# Altium PCB msr50.PcbDoc (part 7 of 8)
Units mil, origin at the board's own origin, x right, y up, seen from the top; angles counter-clockwise.
Board outline 3925 x 3925 mil, 2 copper layers (TopLayer, BottomLayer); 109 components, 122 nets, 846 pads, 52 vias.
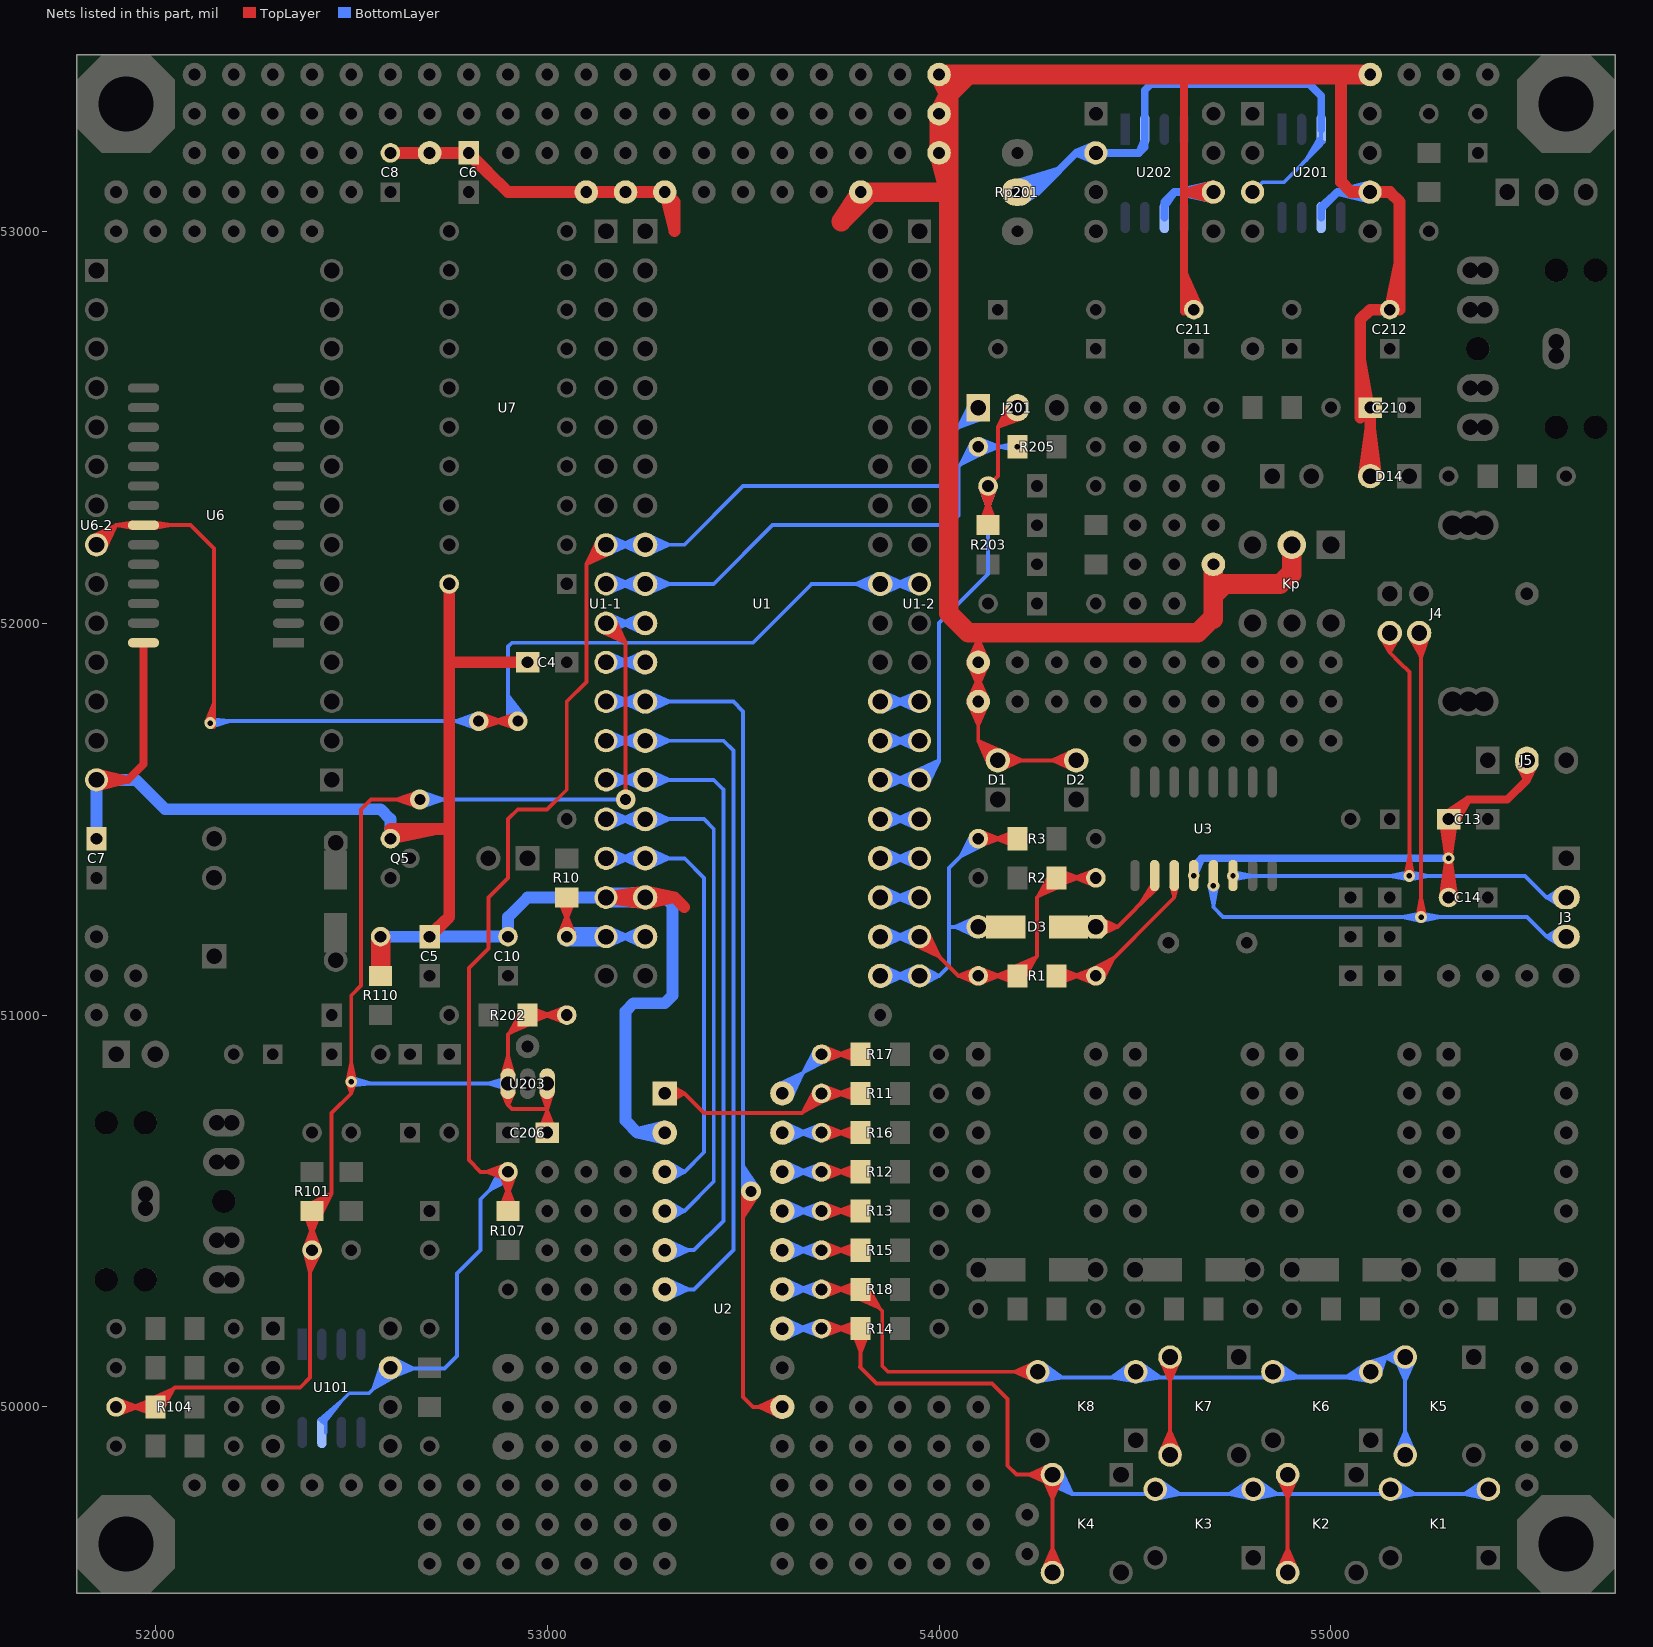
[diagram p7: the nets of this part, all layers, seen from the top]

## Via types
v1: diameter 30, hole 14, TopLayer to BottomLayer, 40 vias
v2: diameter 50, hole 28, TopLayer to BottomLayer, 12 vias

## Nets (pads, with @x,y where several pads share a name; then routed paths per layer and width w, separated by ;. In a path a pad name is that pad's centre, name@x,y a point inside that pad or via, vN(x,y) a via of type N, cw(c..) or ccw(c..) an arc to the next point about the centre after c; other vN are vias at no path point) (continued)
P10: J201.1 R107.2 R107.4 U1-1.9 U1.9 U101.7 U101.17 | length 8040.3
  TopLayer w10: R107.4@52879.77,50503.81 52900,50555.59 ; R107.2@52880.33,50596.36 52900,50545 ; R107.2@52880.4,50596 52900,50550 ; R107.4@52889.46,50501.01 52900,50555.59 ; R107.2@52890.05,50599 52900,50550 ; R107.2@52890.04,50599.09 52900,50545 ; R107.2@52896.36,50580.33 52845,50600 ; R107.2@52896.36,50619.67 52845,50600 ; R107.2@52899.09,50590.04 52845,50600 ; R107.2@52899.09,50609.96 52845,50600 ; R107.4@52900,50500 52900,50570 ; R107.2@52909.95,50599 52900,50550 ; R107.2@52909.96,50599.09 52900,50545 ; R107.4@52910.54,50501.01 52900,50555.59 ; R107.2@52919.6,50596 52900,50550 ; R107.2@52919.67,50596.36 52900,50545 ; R107.4@52920.23,50503.81 52900,50555.59 ; U1-1.9@53129.91,52214.07 53100,52150 ; U1-1.9@53138.73,52209.16 53100,52150 ; U1-1.9@53150,52200 53100,52150 ; U1-1.9@53159.16,52188.73 53100,52150 ; U1-1.9@53164.07,52179.91 53100,52150 ; R107.2@52881.14,50593.33 52900,50570 ; R107.2@52881.14,50593.33 52900,50570 ; R107.2@52881.14,50593.33 52900,50570 ; R107.2@52890.14,50598.33 52900,50570 ; R107.2@52890.14,50598.33 52900,50570 ; R107.2@52890.14,50598.33 52900,50570 ; 52900,50550 52900,50570 ; 52900,50570 R107.2@52909.86,50598.33 ; 52900,50570 R107.2@52918.86,50593.33 ; 52900,50570 R107.2@52909.86,50598.33 ; 52900,50570 R107.2@52918.86,50593.33 ; 52900,50570 R107.2@52909.86,50598.33 ; 52900,50570 R107.2@52918.86,50593.33 ; 52900,50570 R107.2@52900,50600 52830,50600 52800,50630 52800,51120 52850,51170 52850,51300 52900,51350 52900,51500 52925,51525 53000,51525 53050,51575 53050,51800 53100,51850 53100,52150
  BottomLayer w10: U101.17@52420.2,49968.1 52472.44,50012.44 ; U101.17@52425,49963 52472.44,50012.44 ; U101.17@52430.29,49958.42 52472.44,50012.44 ; U101.17@52435,49935 52435,49975 52495,50035 52545,50035 U101.7@52605.12,50095.12 ; U101.7@52578.53,50111.86 52556.39,50046.39 ; U101.7@52587.83,50107.93 52556.39,50046.39 ; U101.7@52601.19,50085.52 52659.59,50097.62 ; U101.7@52602.34,50114.34 52659.59,50097.62 ; U101.7@52602.62,50097.62 52737.62,50097.62 52770,50130 52770,50340 52830,50400 52830,50530 R107.2@52900,50600 ; U101.7@52604.08,50075.81 52659.59,50097.62 ; U101.7@52606,50123.78 52659.59,50097.62 ; U101.7@52610.24,50089.7 52556.39,50046.39 ; U101.7@52615.98,50081.39 52556.39,50046.39 ; R107.2@52883.86,50611.81 52853.79,50553.79 ; R107.2@52892.41,50606.51 52853.79,50553.79 ; R107.2@52906.51,50592.41 52853.79,50553.79 ; R107.2@52911.81,50583.86 52853.79,50553.79 ; U1-1.9@53150,52200 U1.9@53250,52200 53350,52200 53500,52350 54000,52350 54025,52375 54025,52475 J201.1@54100,52550 ; U1-1.9@53151.77,52185.58 53209.53,52200 ; U1-1.9@53151.77,52214.42 53209.53,52200 ; U1-1.9@53155.05,52176 53209.53,52200 ; U1-1.9@53155.05,52224 53209.53,52200 ; U1.9@53244.46,52174.6 53189,52200 ; U1.9@53244.46,52225.4 53189,52200 ; U1.9@53247.9,52184.14 53189,52200 ; U1.9@53247.9,52215.86 53189,52200 ; U1.9@53249.7,52194.01 53189,52200 ; U1.9@53249.7,52205.99 53189,52200 ; U1.9@53250.3,52194.01 53311,52200 ; U1.9@53250.3,52205.99 53311,52200 ; U1.9@53252.1,52184.14 53311,52200 ; U1.9@53252.1,52215.86 53311,52200 ; U1.9@53255.54,52174.6 53311,52200 ; U1.9@53255.54,52225.4 53311,52200 ; J201.1@54080.17,52560.22 54048.79,52498.79 ; J201.1@54088.8,52554.98 54048.79,52498.79 ; J201.1@54100,52545 54048.79,52498.79 ; J201.1@54108.78,52532.84 54048.79,52498.79 ; J201.1@54113.11,52523.71 54048.79,52498.79 ; 52556.39,50046.39 U101.7@52600,50100 52659.59,50097.62
P11: R205.2 R205.4 U1-1.10 U1.10 | length 2817.7
  BottomLayer w10: U1-1.10@53150,52100 U1.10@53250,52100 53425,52100 53575,52250 54025,52250 54050,52275 54050,52400 R205.2@54100,52450 v1(54200,52450) ; U1-1.10@53151.77,52085.58 53209.53,52100 ; U1-1.10@53151.77,52114.42 53209.53,52100 ; U1-1.10@53155.05,52076 53209.53,52100 ; U1-1.10@53155.05,52124 53209.53,52100 ; U1.10@53244.46,52074.6 53189,52100 ; U1.10@53244.46,52125.4 53189,52100 ; U1.10@53247.9,52084.14 53189,52100 ; U1.10@53247.9,52115.86 53189,52100 ; U1.10@53249.7,52094.01 53189,52100 ; U1.10@53249.7,52105.99 53189,52100 ; U1.10@53250.3,52094.01 53311,52100 ; U1.10@53250.3,52105.99 53311,52100 ; U1.10@53252.1,52084.14 53311,52100 ; U1.10@53252.1,52115.86 53311,52100 ; U1.10@53255.54,52074.6 53311,52100 ; U1.10@53255.54,52125.4 53311,52100 ; R205.2@54083.86,52461.81 54053.79,52403.79 ; R205.2@54092.41,52456.51 54053.79,52403.79 ; R205.2@54100.91,52440.04 54155,52450 ; R205.2@54100.91,52459.96 54155,52450 ; R205.2@54103.64,52430.33 54155,52450 ; R205.2@54103.64,52469.67 54155,52450 ; R205.2@54106.51,52442.41 54053.79,52403.79 ; R205.2@54111.81,52433.86 54053.79,52403.79 ; v1@54198.98,52440.05 54151,52450 v1@54198.98,52459.95
P12: C206.1 R101.2 R101.4 R104.2 R104.4 R202.2 R202.4 U1-1.11 U1.11 U203.1 U203.3 | length 9227.6
  TopLayer w10: R104.2@51900,50000 R104.4@52000,50000 52050,50050 52370,50050 52395,50075 R101.2@52395,50405 ; R104.2@51900.91,49990.04 51955,50000 ; R104.2@51900.91,50009.96 51955,50000 ; R104.2@51903.64,49980.33 51955,50000 ; R104.2@51903.64,50019.67 51955,50000 ; R104.4@51988.74,50021.18 52046.8,50046.8 ; R104.4@51993.52,50012.32 52046.8,50046.8 ; R104.4@51996.19,49979.77 51944.41,50000 ; R104.4@51996.19,50020.23 51944.41,50000 ; R104.4@51998.99,49989.46 51944.41,50000 ; R104.4@51998.99,50010.54 51944.41,50000 ; R104.4@52000,50003.94 52046.8,50046.8 ; R104.4@52007.78,49996.75 52046.8,50046.8 ; R104.4@52016.19,49991.21 52046.8,50046.8 ; R101.4@52379.77,50496.19 52400,50444.41 ; R101.2@52380.08,50398.19 52395,50344.65 ; R101.2@52380.33,50403.64 52400,50455 ; R101.4@52389.46,50498.99 52400,50444.41 ; R101.2@52390,50400 52395,50344.65 ; R101.2@52390.04,50400.91 52400,50455 ; R101.4@52392.09,50516.84 52450,50545 ; R101.4@52397.18,50508.16 52450,50545 ; 52400,50425 R101.4@52400,50500 ; R101.4@52403.94,50500 52450,50545 ; R101.2@52409.84,50398.21 52395,50344.65 ; R101.2@52409.96,50400.91 52400,50455 ; R101.4@52410,50505 52450,50545 ; R101.4@52410.54,50498.99 52400,50444.41 ; R101.4@52411.94,50493.06 52450,50545 ; R101.2@52419.27,50394.65 52395,50344.65 ; R101.2@52419.67,50403.64 52400,50455 ; R101.4@52420.23,50496.19 52400,50444.41 ; R101.4@52420.5,50487.76 52450,50545 ; v1@52490.05,50831.02 52500,50879 v1@52509.95,50831.02 ; v1@52490.14,50828.33 52500,50800 ; v1@52509.86,50828.33 52500,50800 ; v2@52671.61,51530.29 52616,51550 ; v2@52671.61,51569.71 52616,51550 ; v2@52674.15,51540.04 52616,51550 ; v2@52674.15,51559.96 52616,51550 ; v2(52675,51550) 52550,51550 52525,51525 52525,51075 52500,51050 52500,50800 ; U203.1@52885.48,50846.86 52900,50894.37 ; U203.1@52885.64,50802.26 52900,50770 ; U203.1@52900,50805.31 52900,50770 ; U203.1@52900,50844.69 52900,50894.37 ; U203.1@52914.36,50802.26 52900,50770 ; U203.1@52914.52,50846.86 52900,50894.37 ; R202.4@52933.81,51008.79 52903.2,50953.2 ; R202.4@52942.22,51003.25 52903.2,50953.2 ; R202.4@52950,50996.06 52903.2,50953.2 ; R202.4@52951.01,50989.46 53005.59,51000 ; R202.4@52951.01,51010.54 53005.59,51000 ; R202.4@52953.81,50979.77 53005.59,51000 ; R202.4@52953.81,51020.23 53005.59,51000 ; R202.4@52956.48,50987.68 52903.2,50953.2 ; R202.4@52961.26,50978.82 52903.2,50953.2 ; C206.1@52979.37,50703.94 53000,50756 ; U203.3@52985.51,50802.94 53000,50760 ; C206.1@52989.05,50701.08 53000,50756 ; C206.1@53000,50700 53000,50760 ; U203.3@53000,50805.32 53000,50760 ; U203.3@53000,50825 53000,50760 ; C206.1@53010.95,50701.08 53000,50756 ; U203.3@53014.49,50802.94 53000,50760 ; C206.1@53020.63,50703.94 53000,50756 ; R202.2@53046.36,50980.33 52995,51000 ; R202.2@53046.36,51019.67 52995,51000 ; R202.2@53049.09,50990.04 52995,51000 ; R202.2@53049.09,51009.96 52995,51000 ; R202.2@53050,51000 R202.4@52950,51000 52900,50950 U203.1@52900,50825 52900,50770 ; U1-1.11@53135.93,51979.91 53200,51950 ; U1-1.11@53140.84,51988.73 53200,51950 ; U1-1.11@53150,52000 53200,51950 ; U1-1.11@53161.27,52009.16 53200,51950 ; U1-1.11@53170.09,52014.07 53200,51950 ; v2(53200,51550) 53200,51950 ; 52395,50344.65 R101.2@52400,50400 52400,50455 ; 52450,50545 52450,50750 52500,50800 ; 52900,50770 52910,50760 53000,50760
  BottomLayer w10: v1@52500,50820 52549.79,50825 ; v1(52500,50830) 52549.79,50825 ; v1@52501.99,50839.8 52549.79,50825 ; v1@52505,50825 U203.1@52900,50825 ; v2(52675,51550) v2(53200,51550) ; v2@52675.85,51540.04 52734,51550 ; v2@52675.85,51559.96 52734,51550 ; v2@52678.39,51530.29 52734,51550 ; v2@52678.39,51569.71 52734,51550 ; U203.1@52897.83,50810.48 52850.32,50825 U203.1@52897.83,50839.52 ; U1-1.11@53150,52000 U1.11@53250,52000 ; U1-1.11@53151.77,51985.58 53209.53,52000 ; U1-1.11@53151.77,52014.42 53209.53,52000 ; U1-1.11@53155.05,51976 53209.53,52000 ; U1-1.11@53155.05,52024 53209.53,52000 ; U1.11@53244.46,51974.6 53189,52000 ; U1.11@53244.46,52025.4 53189,52000 ; U1.11@53247.9,51984.14 53189,52000 ; U1.11@53247.9,52015.86 53189,52000 ; U1.11@53249.7,51994.01 53189,52000 ; U1.11@53249.7,52005.99 53189,52000
P13: U1-1.12 U1.12 | length 704.1
  BottomLayer w10: U1-1.12@53150,51900 U1.12@53250,51900 ; U1-1.12@53151.77,51885.58 53209.53,51900 ; U1-1.12@53151.77,51914.42 53209.53,51900 ; U1-1.12@53155.05,51876 53209.53,51900 ; U1-1.12@53155.05,51924 53209.53,51900 ; U1.12@53244.46,51874.6 53189,51900 ; U1.12@53244.46,51925.4 53189,51900 ; U1.12@53247.9,51884.14 53189,51900 ; U1.12@53247.9,51915.86 53189,51900 ; U1.12@53249.7,51894.01 53189,51900 ; U1.12@53249.7,51905.99 53189,51900
P14: U1-1.13 U1.13 U2.16 | length 4238.4
  TopLayer w10: v2@53500,50550 53500,50025 53525,50000 U2.16@53600,50000 ; v2@53500.23,50553.02 53500,50485.39 ; v2@53510.25,50552.24 53500,50485.39 ; v2(53520,50550) 53500,50485.39 ; v2@53529.31,50546.35 53500,50485.39 ; v2@53538.02,50541.33 53500,50485.39 ; U2.16@53594.46,49974.6 53539,50000 ; U2.16@53594.46,50025.4 53539,50000 ; U2.16@53597.9,49984.14 53539,50000 ; U2.16@53597.9,50015.86 53539,50000 ; U2.16@53599.7,49994.01 53539,50000 ; U2.16@53599.7,50005.99 53539,50000
  BottomLayer w10: U1-1.13@53150,51800 U1.13@53250,51800 53475,51800 53500,51775 v2@53500,50540 ; U1-1.13@53151.77,51785.58 53209.53,51800 ; U1-1.13@53151.77,51814.42 53209.53,51800 ; U1-1.13@53155.05,51776 53209.53,51800 ; U1-1.13@53155.05,51824 53209.53,51800 ; U1.13@53244.46,51774.6 53189,51800 ; U1.13@53244.46,51825.4 53189,51800 ; U1.13@53247.9,51784.14 53189,51800 ; U1.13@53247.9,51815.86 53189,51800 ; U1.13@53249.7,51794.01 53189,51800 ; U1.13@53249.7,51805.99 53189,51800 ; U1.13@53250.3,51794.01 53311,51800 ; U1.13@53250.3,51805.99 53311,51800 ; U1.13@53252.1,51784.14 53311,51800 ; U1.13@53252.1,51815.86 53311,51800 ; U1.13@53255.54,51774.6 53311,51800 ; U1.13@53255.54,51825.4 53311,51800 ; v2@53500.24,50546.93 53500,50613.62 ; v2@53510.26,50547.72 53500,50613.62 ; v2(53520,50550) 53500,50613.62 ; v2@53529.29,50553.71 53500,50613.62 ; v2@53537.96,50558.79 53500,50613.62
P15: U1-1.14 U1.14 U2.6 | length 3162.9
  BottomLayer w10: U1-1.14@53150,51700 U1.14@53250,51700 53450,51700 53475,51675 53475,50400 53375,50300 U2.6@53300,50300 ; U1-1.14@53151.77,51685.58 53209.53,51700 ; U1-1.14@53151.77,51714.42 53209.53,51700 ; U1-1.14@53155.05,51676 53209.53,51700 ; U1-1.14@53155.05,51724 53209.53,51700 ; U1.14@53244.46,51674.6 53189,51700 ; U1.14@53244.46,51725.4 53189,51700 ; U1.14@53247.9,51684.14 53189,51700 ; U1.14@53247.9,51715.86 53189,51700 ; U1.14@53249.7,51694.01 53189,51700 ; U1.14@53249.7,51705.99 53189,51700 ; U1.14@53250.3,51694.01 53311,51700 ; U1.14@53250.3,51705.99 53311,51700 ; U1.14@53252.1,51684.14 53311,51700 ; U1.14@53252.1,51715.86 53311,51700 ; U1.14@53255.54,51674.6 53311,51700 ; U1.14@53255.54,51725.4 53311,51700 ; U2.6@53300.3,50294.01 53361,50300 ; U2.6@53300.3,50305.99 53361,50300 ; U2.6@53302.1,50284.14 53361,50300 ; U2.6@53302.1,50315.86 53361,50300 ; U2.6@53305.54,50274.6 53361,50300 ; U2.6@53305.54,50325.4 53361,50300
P16: U1-1.15 U1.15 U2.5 | length 2927.5
  BottomLayer w10: U1-1.15@53150,51600 U1.15@53250,51600 53425,51600 53450,51575 53450,50475 53375,50400 U2.5@53300,50400 ; U1-1.15@53151.77,51585.58 53209.53,51600 ; U1-1.15@53151.77,51614.42 53209.53,51600 ; U1-1.15@53155.05,51576 53209.53,51600 ; U1-1.15@53155.05,51624 53209.53,51600 ; U1.15@53244.46,51574.6 53189,51600 ; U1.15@53244.46,51625.4 53189,51600 ; U1.15@53247.9,51584.14 53189,51600 ; U1.15@53247.9,51615.86 53189,51600 ; U1.15@53249.7,51594.01 53189,51600 ; U1.15@53249.7,51605.99 53189,51600 ; U1.15@53250.3,51594.01 53311,51600 ; U1.15@53250.3,51605.99 53311,51600 ; U1.15@53252.1,51584.14 53311,51600 ; U1.15@53252.1,51615.86 53311,51600 ; U1.15@53255.54,51574.6 53311,51600 ; U1.15@53255.54,51625.4 53311,51600 ; U2.5@53300.3,50394.01 53361,50400 ; U2.5@53300.3,50405.99 53361,50400 ; U2.5@53302.1,50384.14 53361,50400 ; U2.5@53302.1,50415.86 53361,50400 ; U2.5@53305.54,50374.6 53361,50400 ; U2.5@53305.54,50425.4 53361,50400
P17: U1-1.16 U1.16 U2.4 | length 2611.5
  BottomLayer w10: U1-1.16@53150,51500 U1.16@53250,51500 53400,51500 53425,51475 53425,50575 53350,50500 ; U1-1.16@53151.77,51485.58 53209.53,51500 ; U1-1.16@53151.77,51514.42 53209.53,51500 ; U1-1.16@53155.05,51476 53209.53,51500 ; U1-1.16@53155.05,51524 53209.53,51500 ; U1.16@53244.46,51474.6 53189,51500 ; U1.16@53244.46,51525.4 53189,51500 ; U1.16@53247.9,51484.14 53189,51500 ; U1.16@53247.9,51515.86 53189,51500 ; U1.16@53249.7,51494.01 53189,51500 ; U1.16@53249.7,51505.99 53189,51500 ; U1.16@53250.3,51494.01 53311,51500 ; U1.16@53250.3,51505.99 53311,51500 ; U1.16@53252.1,51484.14 53311,51500 ; U1.16@53252.1,51515.86 53311,51500 ; U1.16@53255.54,51474.6 53311,51500 ; U1.16@53255.54,51525.4 53311,51500 ; U2.4@53300,50500 53350,50500 ; U2.4@53300.36,50494.01 53350,50500 ; U2.4@53300.36,50505.99 53350,50500 ; U2.4@53302.56,50484.21 53350,50500 ; U2.4@53302.56,50515.79 53350,50500 ; U2.4@53306.76,50474.89 53350,50500 ; U2.4@53306.76,50525.11 53350,50500
P32: U1-2.18 U1.23 | length 704.1
  BottomLayer w10: U1.23@53850,51300 U1-2.18@53950,51300 ; U1.23@53850.3,51294.01 53911,51300 ; U1.23@53850.3,51305.99 53911,51300 ; U1.23@53852.1,51284.14 53911,51300 ; U1.23@53852.1,51315.86 53911,51300 ; U1.23@53855.54,51274.6 53911,51300 ; U1.23@53855.54,51325.4 53911,51300 ; U1-2.18@53944.95,51276 53890.47,51300 ; U1-2.18@53944.95,51324 53890.47,51300 ; U1-2.18@53948.23,51285.58 53890.47,51300 ; U1-2.18@53948.23,51314.42 53890.47,51300
P33: U1-2.17 U1.24 | length 704.1
  BottomLayer w10: U1.24@53850,51400 U1-2.17@53950,51400 ; U1.24@53850.3,51394.01 53911,51400 ; U1.24@53850.3,51405.99 53911,51400 ; U1.24@53852.1,51384.14 53911,51400 ; U1.24@53852.1,51415.86 53911,51400 ; U1.24@53855.54,51374.6 53911,51400 ; U1.24@53855.54,51425.4 53911,51400 ; U1-2.17@53944.95,51376 53890.47,51400 ; U1-2.17@53944.95,51424 53890.47,51400 ; U1-2.17@53948.23,51385.58 53890.47,51400 ; U1-2.17@53948.23,51414.42 53890.47,51400
P34: U1-2.16 U1.25 | length 704.1
  BottomLayer w10: U1.25@53850,51500 U1-2.16@53950,51500 ; U1.25@53850.3,51494.01 53911,51500 ; U1.25@53850.3,51505.99 53911,51500 ; U1.25@53852.1,51484.14 53911,51500 ; U1.25@53852.1,51515.86 53911,51500 ; U1.25@53855.54,51474.6 53911,51500 ; U1.25@53855.54,51525.4 53911,51500 ; U1-2.16@53944.95,51476 53890.47,51500 ; U1-2.16@53944.95,51524 53890.47,51500 ; U1-2.16@53948.23,51485.58 53890.47,51500 ; U1-2.16@53948.23,51514.42 53890.47,51500
P35: J201.2 R203.1 R203.3 U1-2.15 U1.26 | length 3139.2
  TopLayer w10: R203.3@54104.77,52253.81 54125,52305.59 ; R203.1@54105.33,52346.36 54125,52295 ; R203.3@54114.46,52251.01 54125,52305.59 ; R203.1@54115.04,52349.09 54125,52295 ; R203.3@54125,52250 R203.1@54125,52350 54150,52375 54150,52500 ; R203.1@54134.96,52349.09 54125,52295 ; R203.3@54135.54,52251.01 54125,52305.59 ; R203.1@54144.67,52346.36 54125,52295 ; R203.3@54145.23,52253.81 54125,52305.59 ; J201.2@54180.11,52560.15 54150,52500 ; J201.2@54188.79,52554.96 54150,52500 ; J201.2@54200,52545 54150,52500 ; J201.2@54200,52550 54150,52500 ; J201.2@54208.73,52532.8 54150,52500 ; J201.2@54212.98,52523.63 54150,52500
  BottomLayer w10: U1.26@53850,51600 U1-2.15@53950,51600 54000,51650 ; U1.26@53850.3,51594.01 53911,51600 ; U1.26@53850.3,51605.99 53911,51600 ; U1.26@53852.1,51584.14 53911,51600 ; U1.26@53852.1,51615.86 53911,51600 ; U1.26@53855.54,51574.6 53911,51600 ; U1.26@53855.54,51625.4 53911,51600 ; U1-2.15@53935.93,51620.09 54000,51650 ; U1-2.15@53940.84,51611.27 54000,51650 ; U1-2.15@53944.95,51576 53890.47,51600 ; U1-2.15@53944.95,51624 53890.47,51600 ; U1-2.15@53948.23,51585.58 53890.47,51600 ; U1-2.15@53948.23,51614.42 53890.47,51600 ; U1-2.15@53961.27,51590.84 54000,51650 ; U1-2.15@53970.09,51585.93 54000,51650 ; R203.1@54105.33,52346.36 54125,52295 ; R203.1@54115.04,52349.09 54125,52295 ; R203.1@54125,52350 54125,52125 54000,52000 54000,51650 ; R203.1@54134.96,52349.09 54125,52295 ; R203.1@54144.67,52346.36 54125,52295
P36: U1-2.14 U1.27 | length 704.1
  BottomLayer w10: U1.27@53850,51700 U1-2.14@53950,51700 ; U1.27@53850.3,51694.01 53911,51700 ; U1.27@53850.3,51705.99 53911,51700 ; U1.27@53852.1,51684.14 53911,51700 ; U1.27@53852.1,51715.86 53911,51700 ; U1.27@53855.54,51674.6 53911,51700 ; U1.27@53855.54,51725.4 53911,51700 ; U1-2.14@53944.95,51676 53890.47,51700 ; U1-2.14@53944.95,51724 53890.47,51700 ; U1-2.14@53948.23,51685.58 53890.47,51700 ; U1-2.14@53948.23,51714.42 53890.47,51700
P37: U1-2.13 U1.28 | length 704.1
  BottomLayer w10: U1.28@53850,51800 U1-2.13@53950,51800 ; U1.28@53850.3,51794.01 53911,51800 ; U1.28@53850.3,51805.99 53911,51800 ; U1.28@53852.1,51784.14 53911,51800 ; U1.28@53852.1,51815.86 53911,51800 ; U1.28@53855.54,51774.6 53911,51800 ; U1.28@53855.54,51825.4 53911,51800 ; U1-2.13@53944.95,51776 53890.47,51800 ; U1-2.13@53944.95,51824 53890.47,51800 ; U1-2.13@53948.23,51785.58 53890.47,51800 ; U1-2.13@53948.23,51814.42 53890.47,51800
P54: U1-1.17 U1.17 U2.3 | length 2361.5
  BottomLayer w10: U1-1.17@53150,51400 U1.17@53250,51400 53350,51400 53400,51350 53400,50650 53350,50600 ; U1-1.17@53151.77,51385.58 53209.53,51400 ; U1-1.17@53151.77,51414.42 53209.53,51400 ; U1-1.17@53155.05,51376 53209.53,51400 ; U1-1.17@53155.05,51424 53209.53,51400 ; U1.17@53244.46,51374.6 53189,51400 ; U1.17@53244.46,51425.4 53189,51400 ; U1.17@53247.9,51384.14 53189,51400 ; U1.17@53247.9,51415.86 53189,51400 ; U1.17@53249.7,51394.01 53189,51400 ; U1.17@53249.7,51405.99 53189,51400 ; U1.17@53250.3,51394.01 53311,51400 ; U1.17@53250.3,51405.99 53311,51400 ; U1.17@53252.1,51384.14 53311,51400 ; U1.17@53252.1,51415.86 53311,51400 ; U1.17@53255.54,51374.6 53311,51400 ; U1.17@53255.54,51425.4 53311,51400 ; U2.3@53300,50600 53350,50600 ; U2.3@53300.36,50594.01 53350,50600 ; U2.3@53300.36,50605.99 53350,50600 ; U2.3@53302.56,50584.21 53350,50600 ; U2.3@53302.56,50615.79 53350,50600 ; U2.3@53306.76,50574.89 53350,50600 ; U2.3@53306.76,50625.11 53350,50600
P55: R10.1 R10.3 U1-1.19 U1.19 | length 1346.5
  TopLayer w10: R10.3@53029.77,51296.19 53050,51244.41 ; R10.1@53030.33,51203.64 53050,51255 ; R10.3@53039.46,51298.99 53050,51244.41 ; R10.1@53040.04,51200.91 53050,51255 ; R10.1@53050,51200 R10.3@53050,51300 ; R10.1@53059.96,51200.91 53050,51255 ; R10.3@53060.54,51298.99 53050,51244.41 ; R10.1@53069.67,51203.64 53050,51255 ; R10.3@53070.23,51296.19 53050,51244.41
  BottomLayer w10: U1-1.19@53150,51200 U1.19@53250,51200 ; U1-1.19@53151.77,51185.58 53209.53,51200 ; U1-1.19@53151.77,51214.42 53209.53,51200 ; U1-1.19@53155.05,51176 53209.53,51200 ; U1-1.19@53155.05,51224 53209.53,51200 ; U1.19@53244.46,51174.6 53189,51200 ; U1.19@53244.46,51225.4 53189,51200 ; U1.19@53247.9,51184.14 53189,51200 ; U1.19@53247.9,51215.86 53189,51200 ; U1.19@53249.7,51194.01 53189,51200 ; U1.19@53249.7,51205.99 53189,51200
  BottomLayer w50: R10.1@53050,51200 U1-1.19@53150,51200
R\D\: U1-2.10 U1.31 U6-2.8 U6.22 | length 5769.4
  TopLayer w10: U6-2.8@51835.93,52220.09 51900,52250 ; U6-2.8@51840.84,52211.27 51900,52250 ; U6-2.8@51850,52200 51900,52250 ; U6-2.8@51861.27,52190.84 51900,52250 ; U6-2.8@51870.09,52185.93 51900,52250 ; U6.22@51941.18,52243.21 51900,52250 ; U6.22@51941.18,52256.79 51900,52250 ; U6.22@51941.73,52250 51900,52250 ; U6.22@51998.11,52250 52039.92,52250 ; U6.22@51998.67,52243.21 52039.92,52250 ; U6.22@51998.67,52256.79 52039.92,52250 ; v1@52130.42,51747.88 52150,51795.54 ; v1(52140,51745) 52150,51795.54 ; v1@52149.95,51744.02 52150,51795.54 ; v1@52150,51735 52150,52190 52090,52250 U6.22@51969.92,52250 51900,52250 ; v2(52825,51750) v2(52925,51750) ; v2@52825.85,51740.04 52884,51750 ; v2@52825.85,51759.96 52884,51750 ; v2@52828.39,51730.29 52884,51750 ; v2@52828.39,51769.71 52884,51750 ; v2@52921.61,51730.29 52866,51750 ; v2@52921.61,51769.71 52866,51750 ; v2@52924.15,51740.04 52866,51750 ; v2@52924.15,51759.96 52866,51750
  BottomLayer w10: v1@52130,51750 v2(52825,51750) ; v1(52140,51745) 52189.4,51750 ; v1@52140,51755 52189.4,51750 ; v1@52142,51735.2 52189.4,51750 ; v2@52821.61,51730.29 52766,51750 ; v2@52821.61,51769.71 52766,51750 ; v2@52824.15,51740.04 52766,51750 ; v2@52824.15,51759.96 52766,51750 ; v2@52900,51750 52900,51940 52910,51950 53525,51950 53675,52100 U1.31@53850,52100 U1-2.10@53950,52100 ; v2@52905.48,51745.63 52900,51815.91 ; v2@52915.42,51747.13 52900,51815.91 ; v2(52925,51750) 52900,51815.91 ; v2@52934.07,51754.2 52900,51815.91 ; v2@52942.5,51759.67 52900,51815.91 ; U1.31@53844.46,52074.6 53789,52100 ; U1.31@53844.46,52125.4 53789,52100 ; U1.31@53847.9,52084.14 53789,52100 ; U1.31@53847.9,52115.86 53789,52100 ; U1.31@53849.7,52094.01 53789,52100 ; U1.31@53849.7,52105.99 53789,52100 ; U1.31@53850.3,52094.01 53911,52100 ; U1.31@53850.3,52105.99 53911,52100 ; U1.31@53852.1,52084.14 53911,52100 ; U1.31@53852.1,52115.86 53911,52100 ; U1.31@53855.54,52074.6 53911,52100 ; U1.31@53855.54,52125.4 53911,52100 ; U1-2.10@53944.95,52076 53890.47,52100 ; U1-2.10@53944.95,52124 53890.47,52100 ; U1-2.10@53948.23,52085.58 53890.47,52100 ; U1-2.10@53948.23,52114.42 53890.47,52100
RX: D3.1 D3.3 U3.2 | length 621.7
  TopLayer w10: D3.1@54400,51225 54455,51225 ; D3.1@54402.05,51210.14 54455,51225 ; D3.1@54402.05,51239.86 54455,51225 ; D3.1@54405.68,51200.65 54455,51225 ; D3.1@54405.68,51249.35 54455,51225 ; U3.2@54544.34,51332.12 54512.62,51282.62 ; U3.2@54550,51328 54512.62,51282.62 ; U3.2@54550,51356 54550,51320 54455,51225 ; U3.2@54555.13,51323.24 54512.62,51282.62
RXD: D3.2 D3.4 R3.1 R3.3 U1-2.20 U1.21 | length 2524.7
  TopLayer w10: R3.1@54100,51450 R3.3@54200,51450 ; R3.1@54100.91,51440.04 54155,51450 ; R3.1@54100.91,51459.96 54155,51450 ; R3.1@54103.64,51430.33 54155,51450 ; R3.1@54103.64,51469.67 54155,51450 ; R3.3@54196.19,51429.77 54144.41,51450 ; R3.3@54196.19,51470.23 54144.41,51450 ; R3.3@54198.99,51439.46 54144.41,51450 ; R3.3@54198.99,51460.54 54144.41,51450
  BottomLayer w10: U1.21@53850,51100 U1-2.20@53950,51100 54000,51100 ; U1.21@53850.3,51094.01 53911,51100 ; U1.21@53850.3,51105.99 53911,51100 ; U1.21@53852.1,51084.14 53911,51100 ; U1.21@53852.1,51115.86 53911,51100 ; U1.21@53855.54,51074.6 53911,51100 ; U1.21@53855.54,51125.4 53911,51100 ; U1-2.20@53944.95,51076 53890.47,51100 ; U1-2.20@53944.95,51124 53890.47,51100 ; U1-2.20@53948.23,51085.58 53890.47,51100 ; U1-2.20@53948.23,51114.42 53890.47,51100 ; U1-2.20@53952.11,51085.63 54000,51100 ; U1-2.20@53952.11,51114.37 54000,51100 ; U1-2.20@53956.02,51076.22 54000,51100 ; U1-2.20@53956.02,51123.78 54000,51100 ; 54030,51225 D3.2@54100,51225 ; R3.1@54083.86,51461.81 54053.79,51403.79 ; R3.1@54092.41,51456.51 54053.79,51403.79 ; D3.2@54094.79,51200.55 54040,51225 ; D3.2@54094.79,51249.45 54040,51225 ; D3.2@54098.12,51210.12 54040,51225 ; D3.2@54098.12,51239.88 54040,51225 ; R3.1@54106.51,51442.41 54053.79,51403.79 ; R3.1@54111.81,51433.86 54053.79,51403.79 ; 54000,51100 54025,51125 54025,51225 54025,51375 R3.1@54100,51450 54053.79,51403.79
SEG0: K1.2 K1.3 K2.2 K2.3 K3.2 K3.3 K4.2 K4.3 R14.2 R14.4 U2.18 | length 7256.5
  TopLayer w10: R14.2@53700,50200 R14.4@53800,50200 53800,50104.12 53797.94,50102.06 53840,50060 54135,50060 54175,50020 54175,49850 54197.62,49827.38 K4.2@54289.38,49827.38 K4.3@54289.38,49577.38 ; R14.2@53700.91,50190.04 53755,50200 ; R14.2@53700.91,50209.96 53755,50200 ; R14.2@53703.64,50180.33 53755,50200 ; R14.2@53703.64,50219.67 53755,50200 ; R14.4@53779.77,50192.25 53800,50140.47 ; R14.4@53789.46,50195.05 53800,50140.47 ; R14.4@53796.19,50179.77 53744.41,50200 ; R14.4@53796.19,50220.23 53744.41,50200 ; R14.4@53798.99,50189.46 53744.41,50200 ; R14.4@53798.99,50210.54 53744.41,50200 ; R14.4@53800,50196.06 53800,50140.47 ; R14.4@53810.54,50195.05 53800,50140.47 ; R14.4@53820.23,50192.25 53800,50140.47 ; K4.3@54264.92,49582.59 54289.38,49637.38 ; K4.2@54264.92,49822.17 54289.38,49767.38 ; K4.3@54274.49,49579.26 54289.38,49637.38 ; K4.2@54274.49,49825.51 54289.38,49767.38 ; K4.2@54284.17,49802.93 54229.38,49827.38 ; K4.2@54284.17,49851.83 54229.38,49827.38 ; K4.2@54287.5,49812.5 54229.38,49827.38 ; K4.2@54287.5,49842.26 54229.38,49827.38 ; K4.3@54304.26,49579.26 54289.38,49637.38 ; K4.2@54304.26,49825.51 54289.38,49767.38 ; K4.3@54313.83,49582.59 54289.38,49637.38 ; K4.2@54313.83,49822.17 54289.38,49767.38 ; K2.3@54864.92,49582.59 54889.38,49637.38 ; K2.2@54864.92,49822.17 54889.38,49767.38 ; K2.3@54874.49,49579.26 54889.38,49637.38 ; K2.2@54874.49,49825.51 54889.38,49767.38 ; K2.3@54889.38,49577.38 K2.2@54889.38,49827.38 ; K2.3@54904.26,49579.26 54889.38,49637.38 ; K2.2@54904.26,49825.51 54889.38,49767.38 ; K2.3@54913.83,49582.59 54889.38,49637.38 ; K2.2@54913.83,49822.17 54889.38,49767.38
  BottomLayer w10: U2.18@53600,50200 R14.2@53700,50200 ; U2.18@53600.3,50194.01 53661,50200 ; U2.18@53600.3,50205.99 53661,50200 ; U2.18@53602.1,50184.14 53661,50200 ; U2.18@53602.1,50215.86 53661,50200 ; U2.18@53605.54,50174.6 53661,50200 ; U2.18@53605.54,50225.4 53661,50200 ; R14.2@53696.36,50180.33 53645,50200 ; R14.2@53696.36,50219.67 53645,50200 ; R14.2@53699.09,50190.04 53645,50200 ; R14.2@53699.09,50209.96 53645,50200 ; K4.2@54275.1,49806.86 54339.38,49777.38 ; K4.2@54279.95,49815.71 54339.38,49777.38 ; K4.2@54289.38,49827.38 54339.38,49777.38 ; K4.2@54301.05,49836.8 54339.38,49777.38 ; K4.2@54309.9,49841.66 54339.38,49777.38 ; K3.3@54550.68,49774.93 54614.03,49777.38 ; K3.3@54551.87,49764.88 54614.03,49777.38 ; K3.3@54551.88,49789.88 54614.03,49777.38 ; K3.3@54556.55,49804.13 54614.03,49777.38 ; K3.3@54561.54,49812.94 54614.03,49777.38 ; K3.2@54792.18,49812.93 54739.92,49777.38 ; K3.2@54797.18,49804.13 54739.92,49777.38 ; K3.2@54800.67,49774.93 54863.5,49777.38 ; K3.2@54803.08,49774.93 54739.92,49777.38 ; K3.2@54806.59,49804.12 54863.5,49777.38 ; K3.2@54811.62,49812.91 54863.5,49777.38 ; K2.2@54865.17,49821.13 54889.38,49777.38 ; K2.2@54874.54,49825.13 54889.38,49777.38 ; K2.2@54889.38,49827.38 54889.38,49777.38 ; K2.2@54904.21,49825.13 54889.38,49777.38 ; K2.2@54913.58,49821.13 54889.38,49777.38 ; K1.3@55150.67,49774.93 55213.83,49777.38 ; K1.3@55151.87,49764.88 55213.83,49777.38 ; K1.3@55151.88,49789.88 55213.83,49777.38 ; K1.3@55156.57,49804.13 55213.83,49777.38 ; K1.3@55161.57,49812.93 55213.83,49777.38 ; K1.2@55392.22,49812.94 55339.69,49777.38 ; K1.2@55397.2,49804.14 55339.69,49777.38 ; K1.2@55401.88,49764.88 55339.69,49777.38 ; K1.2@55401.88,49777.38 54951.88,49777.38 54551.88,49777.38 54351.88,49777.38 54339.38,49777.38 ; K1.2@55401.88,49789.88 55339.69,49777.38 ; K1.2@55403.07,49774.93 55339.69,49777.38 ; 54739.92,49777.38 K3.2@54801.88,49789.88 54863.5,49777.38 ; 54739.92,49777.38 54801.88,49764.88 54863.5,49777.38
SEG1: K5.2 K5.3 K6.2 K6.3 K7.2 K7.3 K8.2 K8.3 R18.2 R18.4 U2.19 | length 8013.1
  TopLayer w10: R18.2@53700,50300 R18.4@53800,50300 53855,50245 53855,50105 53870.12,50089.88 K8.3@54251.88,50089.88 ; R18.2@53700.91,50290.04 53755,50300 ; R18.2@53700.91,50309.96 53755,50300 ; R18.2@53703.64,50280.33 53755,50300 ; R18.2@53703.64,50319.67 53755,50300 ; R18.4@53788.74,50278.82 53846.8,50253.2 ; R18.4@53793.52,50287.68 53846.8,50253.2 ; R18.4@53796.19,50279.77 53744.41,50300 ; R18.4@53796.19,50320.23 53744.41,50300 ; R18.4@53798.99,50289.46 53744.41,50300 ; R18.4@53798.99,50310.54 53744.41,50300 ; R18.4@53800,50296.06 53846.8,50253.2 ; R18.4@53807.78,50303.25 53846.8,50253.2 ; R18.4@53816.19,50308.79 53846.8,50253.2 ; K8.3@54246.67,50065.43 54191.88,50089.88 ; K8.3@54246.67,50114.33 54191.88,50089.88 ; K8.3@54250,50075 54191.88,50089.88 ; K8.3@54250,50104.76 54191.88,50089.88 ; K7.3@54564.92,49882.59 54589.38,49937.38 ; K7.2@54564.92,50122.17 54589.38,50067.38 ; K7.3@54574.49,49879.26 54589.38,49937.38 ; K7.2@54574.49,50125.51 54589.38,50067.38 ; K7.3@54589.38,49877.38 K7.2@54589.38,50127.38 ; K7.3@54604.26,49879.26 54589.38,49937.38 ; K7.2@54604.26,50125.51 54589.38,50067.38 ; K7.3@54613.83,49882.59 54589.38,49937.38 ; K7.2@54613.83,50122.17 54589.38,50067.38
  BottomLayer w10: U2.19@53600,50300 R18.2@53700,50300 ; U2.19@53600.3,50294.01 53661,50300 ; U2.19@53600.3,50305.99 53661,50300 ; U2.19@53602.1,50284.14 53661,50300 ; U2.19@53602.1,50315.86 53661,50300 ; U2.19@53605.54,50274.6 53661,50300 ; U2.19@53605.54,50325.4 53661,50300 ; R18.2@53696.36,50280.33 53645,50300 ; R18.2@53696.36,50319.67 53645,50300 ; R18.2@53699.09,50290.04 53645,50300 ; R18.2@53699.09,50309.96 53645,50300 ; K8.3@54250,50075 K6.2@55100,50075 ; K8.3@54250.14,50074.98 54314.96,50075 ; K8.3@54250.93,50064.9 54314.96,50075 ; K8.3@54251.88,50089.88 54314.96,50075 ; K8.3@54256.99,50103.99 54314.96,50075 ; K8.3@54262.2,50112.65 54314.96,50075 ; K8.2@54491.5,50112.63 54439.14,50075 ; K8.2@54496.74,50103.98 54439.14,50075 ; K8.2@54500.15,50074.98 54565.04,50075 ; K8.2@54500.94,50064.9 54565.04,50075 ; K8.2@54502.82,50064.9 54439.14,50075 ; K8.2@54503.62,50074.98 54439.14,50075 ; K8.2@54506.98,50103.99 54565.04,50075 ; K8.2@54512.19,50112.66 54565.04,50075 ; K7.2@54565.17,50121.13 54589.38,50077.38 ; K7.2@54574.54,50125.13 54589.38,50077.38 ; K7.2@54589.38,50127.38 54589.38,50077.38 ; K7.2@54604.21,50125.13 54589.38,50077.38 ; K7.2@54613.58,50121.13 54589.38,50077.38 ; K6.3@54850.13,50074.98 54914.6,50075 ; K6.3@54850.67,50074.93 54913.83,50077.38 ; K6.3@54850.93,50064.9 54914.6,50075 ; K6.3@54851.87,50064.88 54913.83,50077.38 ; K6.3@54851.88,50077.38 K6.2@55101.88,50077.38 ; K6.3@54856.57,50104.13 54913.83,50077.38 ; K6.3@54857.01,50103.98 54914.6,50075 ; K6.3@54861.57,50112.93 54913.83,50077.38 ; K6.3@54862.25,50112.63 54914.6,50075 ; K6.2@55088.86,50111.23 55139.38,50127.38 ; K6.2@55091.6,50112.68 55038.42,50075 ; K6.2@55092.18,50112.93 55039.92,50077.38 ; K6.2@55092.88,50101.88 55139.38,50127.38 ; K6.2@55096.79,50103.99 55038.42,50075 ; K6.2@55097.18,50104.13 55039.92,50077.38 ; K6.2@55101.88,50064.88 55039.92,50077.38 ; K6.2@55102.81,50064.9 55038.42,50075 ; K6.2@55103.08,50074.93 55039.92,50077.38 ; K6.2@55103.6,50074.98 55038.42,50075 ; K6.2@55113.88,50080.88 55139.38,50127.38 ; K6.2@55114.38,50077.38 K6.2@55101.88,50089.88 ; K6.2@55123.22,50076.87 55139.38,50127.38 ; K5.3@55164.92,49882.59 55189.38,49937.38 ; K5.2@55164.92,50122.17 55189.38,50067.38 ; K5.3@55174.49,49879.26 55189.38,49937.38 ; K5.2@55174.49,50125.51 55189.38,50067.38 ; K5.2@55183.12,50103.18 55139.38,50127.38 ; K5.2@55183.12,50151.59 55139.38,50127.38 ; K5.2@55187.12,50112.55 55139.38,50127.38 ; K5.2@55187.12,50142.21 55139.38,50127.38 ; K5.3@55189.38,49877.38 K5.2@55189.38,50127.38 ; K5.2@55189.38,50114.88 K5.2@55189.38,50127.38 ; K5.3@55204.26,49879.26 55189.38,49937.38 ; K5.2@55204.26,50125.51 55189.38,50067.38 ; K5.3@55213.83,49882.59 55189.38,49937.38 ; K5.2@55213.83,50122.17 55189.38,50067.38 ; 54439.14,50075 K8.2@54501.88,50089.88 54565.04,50075 ; 54913.83,50077.38 K6.3@54851.88,50089.88 54914.6,50075 ; 55038.42,50075 K6.2@55101.88,50089.88 ; 55039.92,50077.38 K6.2@55101.88,50089.88 ; K6.2@55101.88,50089.88 55139.38,50127.38 ; 55139.38,50127.38 K5.2@55189.38,50127.38
SEG2: R15.2 R15.4 U2.20 | length 1228.4
  TopLayer w10: R15.2@53700,50400 R15.4@53800,50400 ; R15.2@53700.91,50390.04 53755,50400 ; R15.2@53700.91,50409.96 53755,50400 ; R15.2@53703.64,50380.33 53755,50400 ; R15.2@53703.64,50419.67 53755,50400 ; R15.4@53796.19,50379.77 53744.41,50400 ; R15.4@53796.19,50420.23 53744.41,50400 ; R15.4@53798.99,50389.46 53744.41,50400 ; R15.4@53798.99,50410.54 53744.41,50400
  BottomLayer w10: U2.20@53600,50400 R15.2@53700,50400 ; U2.20@53600.3,50394.01 53661,50400 ; U2.20@53600.3,50405.99 53661,50400 ; U2.20@53602.1,50384.14 53661,50400 ; U2.20@53602.1,50415.86 53661,50400 ; U2.20@53605.54,50374.6 53661,50400 ; U2.20@53605.54,50425.4 53661,50400 ; R15.2@53696.36,50380.33 53645,50400 ; R15.2@53696.36,50419.67 53645,50400 ; R15.2@53699.09,50390.04 53645,50400 ; R15.2@53699.09,50409.96 53645,50400
SEG3: R13.2 R13.4 U2.21 | length 1228.4
  TopLayer w10: R13.2@53700,50500 R13.4@53800,50500 ; R13.2@53700.91,50490.04 53755,50500 ; R13.2@53700.91,50509.96 53755,50500 ; R13.2@53703.64,50480.33 53755,50500 ; R13.2@53703.64,50519.67 53755,50500 ; R13.4@53796.19,50479.77 53744.41,50500 ; R13.4@53796.19,50520.23 53744.41,50500 ; R13.4@53798.99,50489.46 53744.41,50500 ; R13.4@53798.99,50510.54 53744.41,50500
  BottomLayer w10: U2.21@53600,50500 R13.2@53700,50500 ; U2.21@53600.3,50494.01 53661,50500 ; U2.21@53600.3,50505.99 53661,50500 ; U2.21@53602.1,50484.14 53661,50500 ; U2.21@53602.1,50515.86 53661,50500 ; U2.21@53605.54,50474.6 53661,50500 ; U2.21@53605.54,50525.4 53661,50500 ; R13.2@53696.36,50480.33 53645,50500 ; R13.2@53696.36,50519.67 53645,50500 ; R13.2@53699.09,50490.04 53645,50500 ; R13.2@53699.09,50509.96 53645,50500
SEG4: R12.2 R12.4 U2.22 | length 1228.4
  TopLayer w10: R12.2@53700,50600 R12.4@53800,50600 ; R12.2@53700.91,50590.04 53755,50600 ; R12.2@53700.91,50609.96 53755,50600 ; R12.2@53703.64,50580.33 53755,50600 ; R12.2@53703.64,50619.67 53755,50600 ; R12.4@53796.19,50579.77 53744.41,50600 ; R12.4@53796.19,50620.23 53744.41,50600 ; R12.4@53798.99,50589.46 53744.41,50600 ; R12.4@53798.99,50610.54 53744.41,50600
  BottomLayer w10: U2.22@53600,50600 R12.2@53700,50600 ; U2.22@53600.3,50594.01 53661,50600 ; U2.22@53600.3,50605.99 53661,50600 ; U2.22@53602.1,50584.14 53661,50600 ; U2.22@53602.1,50615.86 53661,50600 ; U2.22@53605.54,50574.6 53661,50600 ; U2.22@53605.54,50625.4 53661,50600 ; R12.2@53696.36,50580.33 53645,50600 ; R12.2@53696.36,50619.67 53645,50600 ; R12.2@53699.09,50590.04 53645,50600 ; R12.2@53699.09,50609.96 53645,50600
SEG5: R16.2 R16.4 U2.23 | length 1228.4
  TopLayer w10: R16.2@53700,50700 R16.4@53800,50700 ; R16.2@53700.91,50690.04 53755,50700 ; R16.2@53700.91,50709.96 53755,50700 ; R16.2@53703.64,50680.33 53755,50700 ; R16.2@53703.64,50719.67 53755,50700 ; R16.4@53796.19,50679.77 53744.41,50700 ; R16.4@53796.19,50720.23 53744.41,50700 ; R16.4@53798.99,50689.46 53744.41,50700 ; R16.4@53798.99,50710.54 53744.41,50700
  BottomLayer w10: U2.23@53600,50700 R16.2@53700,50700 ; U2.23@53600.3,50694.01 53661,50700 ; U2.23@53600.3,50705.99 53661,50700 ; U2.23@53602.1,50684.14 53661,50700 ; U2.23@53602.1,50715.86 53661,50700 ; U2.23@53605.54,50674.6 53661,50700 ; U2.23@53605.54,50725.4 53661,50700 ; R16.2@53696.36,50680.33 53645,50700 ; R16.2@53696.36,50719.67 53645,50700 ; R16.2@53699.09,50690.04 53645,50700 ; R16.2@53699.09,50709.96 53645,50700
SEG6: R17.2 R17.4 U2.24 | length 1388.2
  TopLayer w10: R17.2@53700,50900 R17.4@53800,50900 ; R17.2@53700.91,50890.04 53755,50900 ; R17.2@53700.91,50909.96 53755,50900 ; R17.2@53703.64,50880.33 53755,50900 ; R17.2@53703.64,50919.67 53755,50900 ; R17.4@53796.19,50879.77 53744.41,50900 ; R17.4@53796.19,50920.23 53744.41,50900 ; R17.4@53798.99,50889.46 53744.41,50900 ; R17.4@53798.99,50910.54 53744.41,50900
  BottomLayer w10: U2.24@53585.14,50821.33 53652.21,50852.21 ; U2.24@53589.98,50812.47 53652.21,50852.21 ; U2.24@53595.93,50804.41 53652.21,50852.21 ; U2.24@53600,50800 R17.2@53700,50900 ; U2.24@53604.41,50795.93 53652.21,50852.21 ; U2.24@53612.47,50789.98 53652.21,50852.21 ; U2.24@53621.33,50785.14 53652.21,50852.21 ; R17.2@53683.86,50911.81 53653.79,50853.79 ; R17.2@53692.41,50906.51 53653.79,50853.79 ; R17.2@53706.51,50892.41 53653.79,50853.79 ; R17.2@53711.81,50883.86 53653.79,50853.79
SEG7: R11.2 R11.4 U2.1 | length 1545.2
  TopLayer w10: U2.1@53300,50800 53350,50800 ; U2.1@53300.36,50794.01 53350,50800 ; U2.1@53300.36,50805.99 53350,50800 ; U2.1@53302.56,50784.21 53350,50800 ; U2.1@53302.56,50815.79 53350,50800 ; U2.1@53306.76,50774.89 53350,50800 ; U2.1@53306.76,50825.11 53350,50800 ; R11.2@53683.86,50811.81 53653.79,50753.79 ; R11.2@53692.41,50806.51 53653.79,50753.79 ; R11.2@53700.91,50790.04 53755,50800 ; R11.2@53700.91,50809.96 53755,50800 ; R11.2@53703.64,50780.33 53755,50800 ; R11.2@53703.64,50819.67 53755,50800 ; R11.2@53706.51,50792.41 53653.79,50753.79 ; R11.2@53711.81,50783.86 53653.79,50753.79 ; R11.4@53796.19,50779.77 53744.41,50800 ; R11.4@53796.19,50820.23 53744.41,50800 ; R11.4@53798.99,50789.46 53744.41,50800 ; R11.4@53798.99,50810.54 53744.41,50800 ; R11.4@53800,50800 R11.2@53700,50800 53650,50750 53400,50750 53350,50800
SP: Rp201.2 U201.3 U201.13 U202.2 U202.12 | length 2631.8
  BottomLayer w10: U201.3@54800,53100 54825,53125 54880,53125 54975,53220 U201.13@54975,53260 ; U201.13@54969.22,53235.96 54935.48,53180.48 ; U201.13@54975,53232 54935.48,53180.48 ; U201.13@54980.32,53227.45 54935.48,53180.48
  BottomLayer w20: Rp201.2@54195.37,53123.07 54305.47,53155.47 ; Rp201.2@54200,53100 54250,53100 ; Rp201.2@54219.4,53079.56 54305.47,53155.47 ; U202.2@54396.19,53180.85 54350,53200 ; U202.2@54396.19,53219.15 54350,53200 ; U202.12@54525,53225 U202.12@54525,53260 ; 54600.69,53376 54599.69,53375 ; U201.13@54975,53260 54975,53345 ; U201.13@54975,53288 54975,53345 ; Rp201.2@54205,53100 54250,53100 ; Rp201.2@54205,53100 54305.47,53155.47 ; Rp201.2@54205,53100 54250,53100 ; 54250,53100 54211.94,53075.98 54250,53100 ; 54250,53100 54211.94,53124.02 54250,53100 ; 54250,53100 54350,53200 ; 54350,53200 U202.2@54400,53200 54510,53200 ; 54510,53200 U202.12@54525,53232 ; 54510,53200 54525,53215 ; 54525,53215 U202.12@54525,53232 ; 54525,53215 U202.12@54525,53232 ; 54525,53215 U202.12@54525,53260 ; U202.12@54525,53260 54525,53350 54525,53288 54525,53360 ; U202.12@54525,53260 54525,53360 ; 54525,53360 54540,53375 54599.69,53375 ; 54599.69,53375 54945,53375 54975,53345
TX: R1.1 R1.3 U3.3 | length 1226.6
  TopLayer w10: R1.3@54300,51100 R1.1@54400,51100 54600,51300 ; R1.3@54301.01,51089.46 54355.59,51100 ; R1.3@54301.01,51110.54 54355.59,51100 ; R1.3@54303.81,51079.77 54355.59,51100 ; R1.3@54303.81,51120.23 54355.59,51100 ; R1.1@54388.19,51116.14 54446.21,51146.21 ; R1.1@54393.49,51107.59 54446.21,51146.21 ; R1.1@54396.36,51080.33 54345,51100 ; R1.1@54396.36,51119.67 54345,51100 ; R1.1@54399.09,51090.04 54345,51100 ; R1.1@54399.09,51109.96 54345,51100 ; R1.1@54407.59,51093.49 54446.21,51146.21 ; R1.1@54416.14,51088.19 54446.21,51146.21 ; U3.3@54593.05,51327.12 54600,51300 ; U3.3@54600,51328 54600,51300 ; U3.3@54600,51356 54600,51300 ; U3.3@54606.95,51327.12 54600,51300
TXD: R1.2 R1.4 R2.1 R2.3 U1-2.19 U1.22 | length 3393.4
  TopLayer w10: U1-2.19@53935.88,51179.95 54000.74,51149.26 ; U1-2.19@53940.82,51188.74 54000.74,51149.26 ; U1-2.19@53950,51200 54050,51100 ; U1-2.19@53961.26,51209.18 54000.74,51149.26 ; U1-2.19@53970.05,51214.12 54000.74,51149.26 ; R1.2@54096,51080.4 54050,51100 ; R1.2@54096,51119.6 54050,51100 ; R1.2@54099,51090.05 54050,51100 ; R1.2@54099,51109.95 54050,51100 ; R1.2@54100.91,51090.04 54155,51100 ; R1.2@54100.91,51109.96 54155,51100 ; R1.2@54103.64,51080.33 54155,51100 ; R1.2@54103.64,51119.67 54155,51100 ; R1.4@54188.74,51121.18 54246.8,51146.8 ; R1.4@54193.52,51112.32 54246.8,51146.8 ; R1.4@54196.19,51079.77 54144.41,51100 ; R1.4@54196.19,51120.23 54144.41,51100 ; R1.4@54198.99,51089.46 54144.41,51100 ; R1.4@54198.99,51110.54 54144.41,51100 ; R1.4@54200,51103.94 54246.8,51146.8 ; R1.4@54207.78,51096.75 54246.8,51146.8 ; R1.4@54216.19,51091.21 54246.8,51146.8 ; R2.3@54283.81,51358.79 54253.2,51303.2 ; R2.3@54292.22,51353.25 54253.2,51303.2 ; R2.3@54300,51346.06 54253.2,51303.2 ; R2.3@54301.01,51339.46 54355.59,51350 ; R2.3@54301.01,51360.54 54355.59,51350 ; R2.3@54303.81,51329.77 54355.59,51350 ; R2.3@54303.81,51370.23 54355.59,51350 ; R2.3@54306.48,51337.68 54253.2,51303.2 ; R2.3@54311.26,51328.82 54253.2,51303.2 ; R2.1@54396.36,51330.33 54345,51350 ; R2.1@54396.36,51369.67 54345,51350 ; R2.1@54399.09,51340.04 54345,51350 ; R2.1@54399.09,51359.96 54345,51350 ; R2.1@54400,51350 R2.3@54300,51350 54250,51300 54250,51150 R1.4@54200,51100 R1.2@54100,51100 54050,51100
  BottomLayer w10: U1.22@53850,51200 U1-2.19@53950,51200 ; U1.22@53850.3,51194.01 53911,51200 ; U1.22@53850.3,51205.99 53911,51200 ; U1.22@53852.1,51184.14 53911,51200 ; U1.22@53852.1,51215.86 53911,51200 ; U1.22@53855.54,51174.6 53911,51200 ; U1.22@53855.54,51225.4 53911,51200 ; U1-2.19@53944.95,51176 53890.47,51200 ; U1-2.19@53944.95,51224 53890.47,51200 ; U1-2.19@53948.23,51185.58 53890.47,51200 ; U1-2.19@53948.23,51214.42 53890.47,51200
UD+: J3.3 J4.3 U3.5 | length 2761.6
  TopLayer w10: J4.3@55200.11,51967.47 55230,51913.56 ; J4.3@55209.36,51971.64 55230,51913.56 ; J4.3@55219.05,51974.22 55230,51913.56 ; v1@55220.05,51251.02 55230,51299 v1@55239.95,51251.02 ; v1(55230,51250) 55230,51970 J4.3@55225,51975 55230,51913.56 ; J4.3@55231,51975.2 55230,51913.56 ; J4.3@55240.98,51974.22 55230,51913.56 ; J4.3@55250.78,51971.6 55230,51913.56
  BottomLayer w10: v1@54690.05,51328.98 54700,51281 v1@54709.95,51328.98 ; v1(54700,51330) 54700,51275 54725,51250 v1(55230,51250) 55500,51250 55550,51200 ; v1@55228.98,51240.05 55181,51250 v1@55228.98,51259.95 ; v1@55231.02,51240.05 55279,51250 v1@55231.02,51259.95 ; J3.3@55588.06,51175.98 55550,51200 ; J3.3@55588.06,51224.02 55550,51200 ; J3.3@55592.5,51185.21 55550,51200 ; J3.3@55592.5,51214.79 55550,51200 ; J3.3@55595,51200 55550,51200 ; J3.3@55600,51200 55550,51200
UD-: J3.2 J4.2 U3.6 | length 2430.5
  TopLayer w10: J4.2@55124.89,51968.24 55150,51925 ; J4.2@55134.21,51972.44 55150,51925 ; J4.2@55144.01,51974.64 55150,51925 ; J4.2@55150,51975 55150,51925 ; J4.2@55155.99,51974.64 55150,51925 ; J4.2@55165.79,51972.44 55150,51925 ; J4.2@55175.11,51968.24 55150,51925 ; v1@55190.05,51356.02 55200,51404 v1@55209.95,51356.02 ; v1(55200,51355) 55200,51875 55175,51900 55150,51925
  BottomLayer w10: v1(54750,51355) v1(55200,51355) 55495,51355 55550,51300 ; v1@54751.02,51345.05 54799,51355 v1@54751.02,51364.95 ; v1@55198.98,51345.05 55151,51355 v1@55198.98,51364.95 ; v1@55201.02,51345.05 55249,51355 v1@55201.02,51364.95 ; J3.2@55588.06,51275.98 55550,51300 ; J3.2@55588.06,51324.02 55550,51300 ; J3.2@55592.5,51285.21 55550,51300 ; J3.2@55592.5,51314.79 55550,51300 ; J3.2@55595,51300 55550,51300 ; J3.2@55600,51300 55550,51300
V33: C13.1 C14.2 J5.2 U3.4 | length 2245.7
  TopLayer w20: C13.1@55284.07,51498.51 55300,51414 C13.1@55315.93,51498.51 ; C14.2@55285.06,51301.32 55300,51385 C14.2@55314.94,51301.32 ; C13.1@55287.8,51478.73 v1(55300,51400) ; C14.2@55288.59,51321.08 v1(55300,51400) ; C13.1@55293.58,51512.14 55350,51550 ; C14.2@55300,51300 v1(55300,51400) ; C13.1@55304,51500 55350,51550 ; C14.2@55311.41,51321.08 v1(55300,51400) ; C13.1@55312.2,51478.73 v1(55300,51400) ; C13.1@55316.97,51490.63 55350,51550 ; J5.2@55480.5,51640.56 55500,51600 ; J5.2@55500,51645 55500,51600 ; J5.2@55500,51650 55500,51600 ; J5.2@55519.5,51640.56 55500,51600 ; v1(55300,51400) C13.1@55300,51500 55350,51550 ; 55350,51550 55450,51550 55500,51600
  BottomLayer w20: v1(55300,51400) 54670,51400 ; v1(54650,51356) 54650,51380 ; v1(54650,51356) 54670,51400 ; v1(54650,51356) 54650,51380 ; 54650,51380 54670,51400
VCC: C4.1 C5.1 C6.1 C7.1 C8.2 C10.2 C210.1 C211.2 C212.2 D1.1 D2.1 D14.1 Kp.2 pad.13@54700,52150 pad.24@54000,53200 pad.29@54000,53300 pad.30@54000,53400 pad.36@54100,51900 pad.37@54100,51800 pad.75 pad.84 pad.88 pad.89 pad.90 pad.103 Q5.1 R110.2 R110.4 U1-1.18 U1.18 U2.2 U6-2.14 U6.28 U7.20 U201.6 U201.16 U202.6 U202.16 | length 18521.9
  TopLayer w10: pad.37@54075.55,51794.79 54100,51740 ; pad.37@54075.55,51805.21 54100,51860 ; pad.36@54075.55,51894.79 54100,51840 ; pad.36@54075.55,51905.21 54100,51960 ; pad.37@54085.12,51798.12 54100,51740 ; pad.37@54085.12,51801.88 54100,51860 ; pad.36@54085.12,51898.12 54100,51840 ; pad.36@54085.12,51901.88 54100,51960 ; 54100,51975 54100,51700 ; pad.37@54114.88,51798.12 54100,51740 ; pad.37@54114.88,51801.88 54100,51860 ; pad.36@54114.88,51898.12 54100,51840 ; pad.36@54114.88,51901.88 54100,51960 ; pad.37@54124.45,51794.79 54100,51740 ; pad.37@54124.45,51805.21 54100,51860 ; pad.36@54124.45,51894.79 54100,51840 ; pad.36@54124.45,51905.21 54100,51960 ; D1.1@54128.55,51635.31 54100,51700 ; D1.1@54137.48,51640.04 54100,51700 ; D1.1@54145.58,51645.94 54100,51700 ; D1.1@54150.3,51644.01 54211,51650 ; D1.1@54150.3,51655.99 54211,51650 ; D1.1@54152.1,51634.14 54211,51650 ; D1.1@54152.1,51665.86 54211,51650 ; D1.1@54154.06,51654.42 54100,51700 ; D1.1@54155.54,51624.6 54211,51650 ; D1.1@54155.54,51675.4 54211,51650 ; D1.1@54159.96,51662.52 54100,51700 ; D1.1@54164.69,51671.45 54100,51700 ; D2.1@54344.46,51624.6 54289,51650 ; D2.1@54344.46,51675.4 54289,51650 ; D2.1@54347.9,51634.14 54289,51650 ; D2.1@54347.9,51665.86 54289,51650 ; D2.1@54349.7,51644.01 54289,51650 ; D2.1@54349.7,51655.99 54289,51650 ; D2.1@54350,51650 D1.1@54150,51650 54100,51700
  TopLayer w20: U6-2.14@51850,51600 51930,51600 ; U6-2.14@51852.38,51580.62 51930,51600 ; U6-2.14@51852.38,51619.38 51930,51600 ; U6.28@51969.92,51950 51969.92,51639.92 51930,51600 ; 54625,52795 54625,53100 ; 54625,53400 54625,53100 ; C211.2@54635.26,52797.24 54625,52892.75 ; C211.2@54650,52800 54625,52892.75 ; C211.2@54664.13,52805.02 54625,52892.75 ; U202.6@54697.46,53080.64 54625,53100 ; U202.6@54697.46,53119.36 54625,53100 ; U202.6@54700,53100 54625,53100
  TopLayer w30: Q5.1@52600,51450 52722.54,51475 ; 52600,51475 52750,51475 ; C8.2@52600,53200 C6.1@52800,53200 52900,53100 pad.84@53300,53100 ; C5.1@52700,51200 52750,51250 ; C5.1@52700,51204 52750,51250 ; 52750,51300 52750,51250 ; U7.20@52750,52100 52750,51900 ; C6.1@52800,53196 52889.64,53110.36 ; 52830,51900 C4.1@52946,51900 ; C4.1@52950,51900 52750,51900 ; U1.18@53248.72,51284.05 U1-1.18@53150,51300 ; U1.18@53248.72,51315.95 U1-1.18@53150,51300 ; U1.18@53251.71,51284.09 53325,51300 ; U1.18@53251.71,51315.91 53325,51300 ; 53350,51275 53325,51300 ; 55025.69,53125 55025.69,53126 ; 55025.69,53400 55025.69,53126 ; 55050.69,53100 U201.6@55100,53100 55151.38,53100 55151.38,53098.62 55175,53075 55175,52800 ; 55050.69,53101 55025.69,53126 ; C210.1@55075,52525 55075,52775 55100,52800 C212.2@55150,52800 55175,52923.79 ; 55075,52670.59 C210.1@55096,52550 ; D14.1@55084.04,52376.06 55100,52496 D14.1@55115.96,52376.06 ; D14.1@55100,52375 C210.1@55100,52550 ; 52750,51250 52750,51475 ; 52750,51475 52750,51900 ; U1-1.18@53150,51300 U1.18@53250,51300 53325,51300 ; pad.84@53300,53100 53325,53000 53325,53075 pad.84@53300,53100
  TopLayer w50: R110.4@52575,51100 R110.2@52575,51200 ; 53980,53100 pad.88@53800,53100 53750,53025 53825,53100 54025,53100 ; 54025,53113.24 pad.29@54000,53300 ; pad.13@54700,52150 54700,52070 ; 54900,52125 54900,52130 ; Kp.2@54900,52175 54900,52130 ; Kp.2@54900,52200 54900,52130 ; pad.103@55100,53400 55025.69,53400 54625,53400 54075,53400 ; pad.24@54000,53200 pad.29@54000,53300 ; pad.24@54000,53200 54025,53100 ; pad.24@54000,53200 pad.29@54025,53300 ; pad.29@54000,53300 54025,53350 ; 54025,53100 54025,52025 54075,51975 54100,51975 54660,51975 54695,52010 54700,52010 54700,52070 ; 54025,53100 pad.29@54025,53300 ; pad.29@54025,53300 54025,53350 ; 54025,53350 pad.30@54000,53400 54075,53400 ; 54025,53350 54075,53400 ; 54700,52070 54730,52100 54870,52100 54900,52130
  BottomLayer w20: U202.16@54575,53035 54575,53075 54600,53100 ; U202.16@54575,53063 54600,53100 ; U202.6@54697.87,53080.59 54610.47,53100 ; U202.6@54697.87,53119.41 54610.47,53100 ; U201.16@54975,53035 54975,53058.25 55016.75,53100 ; U201.16@54975,53063 55016.75,53100 ; U201.6@55097.71,53080.61 55016.75,53100 ; U201.6@55097.71,53119.39 55016.75,53100 ; 54600,53100 U202.6@54700,53100 54610.47,53100 ; 55016.75,53100 U201.6@55100,53100 55016.75,53100
  BottomLayer w30: C7.1@51850,51450 U6-2.14@51850,51600 51950,51600 52025,51525 52575,51525 52600,51500 Q5.1@52600,51450 ; C7.1@51850,51454 51850,51570 ; R110.2@52575,51200 C5.1@52700,51200 52816,51200.5 ; C5.1@52700.5,51200.5 C10.2@52900,51200.5 ; 52785,51200.5 C10.2@52900,51200 ; C10.2@52900.46,51200.5 C10.2@52900,51200.5 ; U1-1.18@53150,51300 52950,51300 52900,51250 ; U1.18@53250,51300 53300,51300 ; U1.18@53252.56,51284.21 53300,51300 ; U1.18@53252.56,51315.79 53300,51300 ; U2.2@53298.17,50684.1 53230,50700 ; U2.2@53298.17,50715.9 53230,50700 ; U2.2@53300,50700 53230,50700 ; C10.2@52900,51200 52900,51250 ; C10.2@52900,51200 C10.2@52900,51200.5 ; C10.2@52900,51200.5 52900,51250 ; 53230,50700 53200,50730 53200,50755 53200,51010 53220,51030 53300,51030 53320,51050 53320,51280 53300,51300
  BottomLayer w50: U1-1.18@53150,51300 U1.18@53250,51300